# Altium PCB 把手指纹密码锁20201030.PcbDoc (part 1 of 2)
Units mm, origin at the board's own origin, x right, y up, seen from the top; angles counter-clockwise.
Board outline 142.19 x 18 mm, 2 copper layers (Top Layer, Bottom Layer); 76 components, 61 nets, 259 pads, 300 vias.
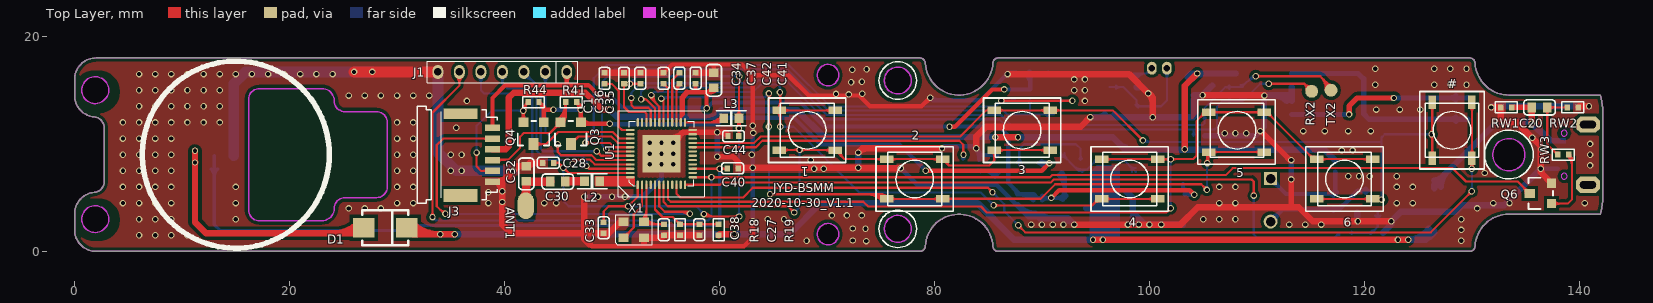
[diagram p0: Top Layer view]
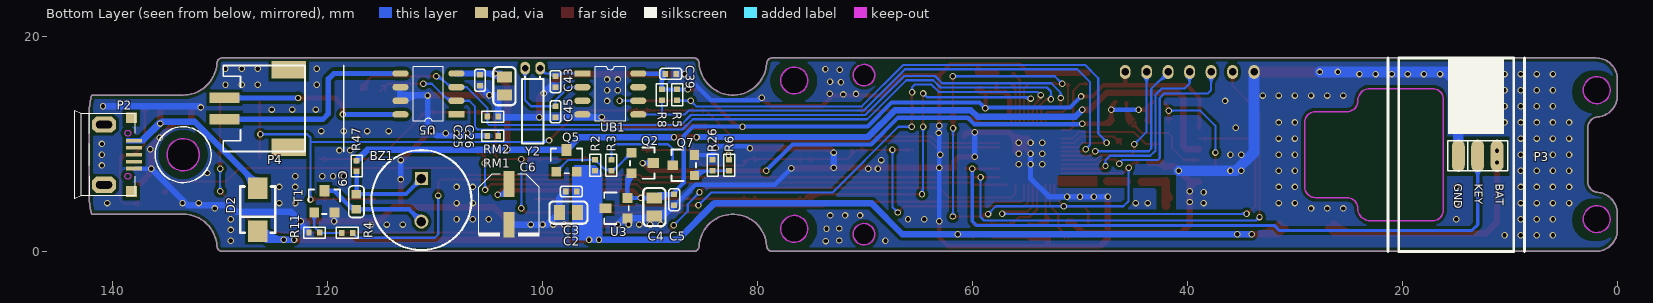
[diagram p1: Bottom Layer view, seen from below]
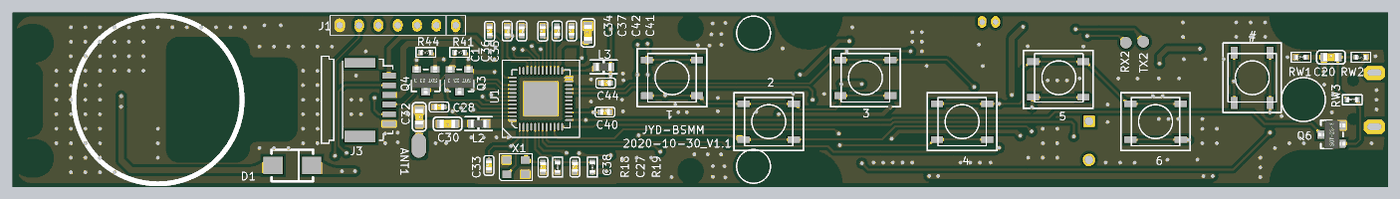
[diagram p3: 3D render of the assembled board from above, using the file's embedded part models]
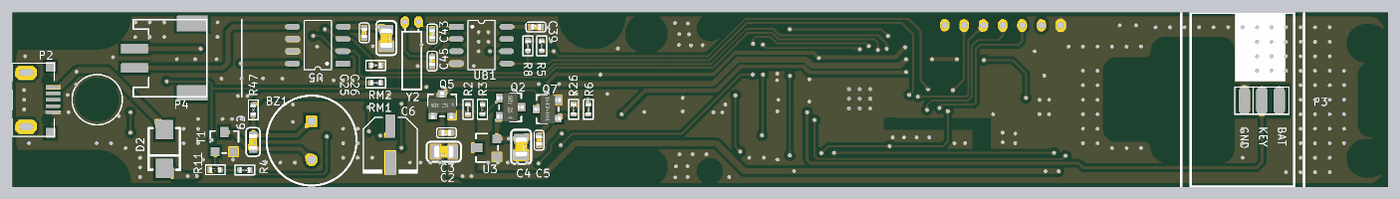
[diagram p4: 3D render of the assembled board from below, using the file's embedded part models]

## Layer stack, top to bottom
Top Layer: signal copper 0.0356
Dielectric: dielectric 0.32, FR-4, Dk 4.8
Bottom Layer: signal copper 0.0356

## Board outline
2,0.005 cw(c2,2.005) 0,2.005 0,3.505 cw(c2,3.505) 1.833,5.498 ccw(c1.75,6.494) 2.75,6.494 2.75,11.515 ccw(c1.75,11.515) 1.833,12.512 cw(c2,14.505) 0,14.505 0,16.005 cw(c2,16.005) 2,18.005 78.645,18.005 cw(c78.645,17.505) 79.145,17.531 ccw(c82.29,17.7) 85.436,17.531 cw(c85.935,17.505) 85.935,18.005 129.795,18.005 cw(c129.795,17.505) 130.295,17.531 ccw(c133.44,17.7) 133.44,14.55 141.945,14.55 cw(c137.19,13.005) 142.19,13.005 142.19,5.005 cw(c137.19,5.005) 141.945,3.459 133.44,3.459 ccw(c133.44,0.309) 130.295,0.478 cw(c129.795,0.505) 129.795,0.005 85.935,0.005 cw(c85.935,0.505) 85.436,0.478 ccw(c82.29,0.309) 79.145,0.478 cw(c78.645,0.505) 78.645,0.005
cut-out: 75.34,15.905 ccw(c76.59,15.905) 76.59,14.655 ccw(c76.59,15.905) 77.84,15.905 ccw(c76.59,15.905) 76.59,17.155 ccw(c76.59,15.905)
cut-out: 69.09,16.405 ccw(c70.09,16.405) 70.09,15.405 ccw(c70.09,16.405) 71.09,16.405 ccw(c70.09,16.405) 70.09,17.405 ccw(c70.09,16.405)
cut-out: 75.34,2.105 ccw(c76.59,2.105) 76.59,0.855 ccw(c76.59,2.105) 77.84,2.105 ccw(c76.59,2.105) 76.59,3.355 ccw(c76.59,2.105)
cut-out: 69.09,1.605 ccw(c70.09,1.605) 70.09,0.605 ccw(c70.09,1.605) 71.09,1.605 ccw(c70.09,1.605) 70.09,2.605 ccw(c70.09,1.605)
cut-out: 1.921,13.755 cw(c1.921,15.005) 0.671,15.005 cw(c1.921,15.005) 1.921,16.255 cw(c1.921,15.005) 3.171,15.005 cw(c1.921,15.005)
cut-out: 1.921,1.755 cw(c1.921,3.005) 0.671,3.005 cw(c1.921,3.005) 1.921,4.255 cw(c1.921,3.005) 3.171,3.005 cw(c1.921,3.005)
cut-out: 131.94,9.005 ccw(c133.44,9.005) 133.44,7.505 ccw(c133.44,9.005) 134.94,9.005 ccw(c133.44,9.005) 133.44,10.505 ccw(c133.44,9.005)

## Design rules (kind name [scope] priority, off if disabled: settings)
Clearance Clearance_2 [All] p1: gap=0.1
Clearance Clearance_1 [All] p2 off: gap=0.3
Clearance [All] p3 off: gap=0.2
HoleToHoleClearance [All] p1: gap=-20 allowstackedmicrovias=TRUE
MinimumSolderMaskSliver [All] p1: minsoldermaskwidth=-20
PolygonConnect [All] p1: connectstyle=Direct reliefconductorwidth=0.254 reliefentries=4 polygonreliefangle="90 Angle" airgapwidth=0.254
RoutingVias [All] p1: holewidth=0.4 width=0.6 viastyle="Through Hole" minholewidth=0.3 minwidth=0.5 maxholewidth=0.4 maxwidth=0.6
ShortCircuit [All] p1: allowed=TRUE
SilkToSilkClearance [All] p1: silktosilkclearance=-20
SilkToSolderMaskClearance [IsPad] p1: minsilkscreentomaskgap=-20 clearancetoexposedcopper=TRUE
SolderMaskExpansion [All] p1: expansion=0.102
Width [All] p1: maxlimit=2 minlimit=0.15 preferedwidth=0.2
23 further rules are at their usual default settings.

## Components (designator, comment, footprint, x,y, rotation, side; value= is the part's Value field where it differs from the comment)
1 "SW" KEY_5.1*5.1*1.5 68.16,11.275 r0 top locked
2 "SW" KEY_5.1*5.1*1.5 78.16,6.735 r180 top locked
3 "SW" KEY_5.1*5.1*1.5 88.16,11.275 r0 top locked
4 "SW" KEY_5.1*5.1*1.5 98.16,6.735 r180 top locked
5 "SW" KEY_5.1*5.1*1.5 108.1,11.1 r180 top
6 "SW" KEY_5.1*5.1*1.5 118.16,6.735 r180 top locked
# "SW" KEY_5.1*5.1*1.5 128.16,11.275 r90 top locked
ANT1 "ANT" ANT_mark 41.975,4.25 r270 top
BZ1 "BUZZER" BUZZER_D93_L40 111.275,4.775 r270 bottom
C1 "100nF" 0402C 49.3,16.1 r90 top
C2 "10uF" 0805C 97.6,3.617 r0 bottom
C3 "100nF" 0402C 97.325,5.575 r0 bottom
C4 "10uF" 0805C 89.6,4.125 r270 bottom
C5 "100nF" 0402C 87.75,4.808 r270 bottom
C6 "220uF" R5*5.8 103.125,4.375 r270 bottom
C9 "10uF" 0603C 117.325,4.625 r270 bottom (schematic designator c9)
C20 "10uF" 0603C 136.3,13.4 r0 top
C25 "100nF" 0402C 105.825,15.925 r270 bottom
C26 "22uF" 0805C 103.55,15.375 r270 bottom
C27 "1nF" 0402C 58.125,2.025 r90 top
C28 "1uF" 0402C 44.075,8.25 r0 top
C30 "1.5pF" 0603C 44.95,6.5 r180 top
C32 "1pF" 0603C 42.025,7.225 r270 top
C33 "100nF" 0402C 49.225,2.196 r90 top
C34 "100nF" 0402C 54.8,16.1 r90 top
C35 "1uF" 0402C 52.628,16.108 r270 top
C36 "100nF" 0402C 51.114,16.108 r270 top
C37 "100nF" 0402C 56.275,16.125 r270 top
C38 "2.7pF" 0402C 54.825,2.025 r90 top
C39 "100nF" 0402C 88.075,16.525 r180 bottom
C40 "1nF" 0402C 61.225,7.725 r0 top
C41 "10uF" 0603C 59.475,15.925 r90 top
C42 "100nF" 0402C 57.775,16.125 r90 top
C43 "22pF" 0402C 98.8,15.8 r270 bottom
C44 "10uF" 0402C 61.3,10.725 r0 top
C45 "22pF" 0402C 98.8,13 r90 bottom
D1 "SS14" DO-214AA 28.9,2.2 r180 top
D2 "SS14" DO-214AA 126.5,3.9 r90 bottom
J1 "7P" 7P-2.0MM 45.8,16.7 r180 top
J3 "指纹串口" SM06B-SRSS-TB 38.9,9 r270 top locked
L2 "2nH" 0603L 48.15,6.525 r0 top
L3 "2.2UH" 0603L 61.1,12.4 r0 top
P2 "MICROUSB" MICRO-USB_F-B 139.4,9 r270 bottom
P3 "电池盒" 3P-1.8MM 14.8,8.9 r180 bottom
P4 "电机接口" S2B-PH-SM3-TB 128.1,13.3 r90 bottom
Q2 "SI2301" "SOT-23 - GDS" 90.725,8.225 r270 bottom
Q3 "BSS123W" "SOT-23 - GDS" 46.17,11 r180 top
Q4 "BSS123W" "SOT-23 - GDS" 42.7,11 r180 top
Q5 "SI2301" "SOT-23 - GDS" 97.775,8.425 r180 bottom
Q6 "PMBT3904" "SOT-23 - BCE" 136.4,5.4 r90 top
Q7 "PMBT3904" "SOT-23 - BCE" 86.875,8.025 r90 bottom
R2 "100K" 0402R 95.1,8.012 r90 bottom
R3 "1K" 0402R 93.6,8.012 r90 bottom
R4 "200R" 0402R 118.175,1.725 r180 bottom
R5 "10K" 0402R 87.475,14.575 r90 bottom
R6 "4.7K" 0402R 82.65,8.012 r90 bottom
R8 "10K" 0402R 88.9,14.575 r90 bottom
R11 "10K" 0402R 121.225,1.75 r0 bottom
R18 "100K%1" 0402R 56.325,2.025 r270 top
R19 "510%1" 0402R 59.925,2.025 r90 top
R26 "10K" 0402R 84.175,8.012 r90 bottom
R41 "10K" 0402R 46.2,13.9 r0 top
R44 "10K" 0402R 42.7,13.9 r0 top
R47 "10R" 0402R 117.3,7.95 r90 bottom
RM1 "10K" 0402R 104.625,10.75 r180 bottom
RM2 "10K" 0402R 104.625,12.55 r0 bottom
RW1 "100K" 0402R 133.2,13.4 r180 top
RW2 "100K" 0402R 139.4,13.4 r180 top
RW3 "100R" 0402R 138.5,9 r180 top
T1 "SS8050" SOT-23-3L 120.3,4.625 r180 bottom
U1 "BK3435QFN48_A" QFN48_6*6*0.4 54.6,9.1 r90 top
U3 "HT7533" SOT-23-3L 93.125,4.025 r90 bottom
U5 "CP2117" SOP8 110.625,14.65 r0 bottom
UB1 "PCF8563" SOP8 93.7,14.65 r180 bottom
X1 "16MHZ" XTAL3225 52.025,2.025 r0 top
Y2 "32.768KHZ" 晶振-9 100.225,17.05 r0 bottom

## Footprints (in the part's own frame and the unit in brackets; to place one, negate y for a bottom-side part, rotate by r counter-clockwise, add the part's x,y. Pads: shape width x height; smd on the part's side, far side on the other; paste and mask are expansions set on the pad)
3P-1.8MM [mm]
  oval 1.2x3 smd: 1(0,0) 2(1.8,0) 3(3.6,0)
  silkscreen extent -1,-1.4 4.6,1.4
7P-2.0MM [mm]
  oval 1x1.3 hole 0.7 mask+0.05: 1(0,0) 2(2,0) 3(4,0) 4(6,0) 5(8,0) 6(10,0) 7(12,0)
  silkscreen extent -1,-1 13,1
0402C [mil]
  rect 20x22 smd mask+2: 1(-20,0) 2(20,0)
  silkscreen extent -40,-20 40,20, body extent -19,-12 20,12, height 8
0402R [mil]
  rect 20x22 smd mask+2: 1(-20,0) 2(20,0)
  silkscreen extent -40,-20 40,20, body extent -23,-11 23,11, height 16
0603C [mm]
  rect 0.8x0.9 smd: 1(-0.711,0) 2(0.711,0)
  silkscreen extent -1.47,-0.71 1.47,0.71, body extent -0.8,-0.4 0.8,0.4, height 0.3
0603L [mm]
  rect 0.8x0.9 smd: 1(-0.711,0) 2(0.711,0)
  silkscreen extent -1.4,-0.7 1.4,0.7, body extent -0.82,-0.41 0.82,0.41, height 0.46
0805C [mil]
  rect 40x56 smd: 1(-33,0) 2(33,0)
  silkscreen extent -70,-41 70,41, body extent -39,-25 39,25, height 30
ANT_mark [mm]
  oval 2.5x1.5 smd: 1(0,0)
BUZZER_D93_L40 [mm]
  rect 1.2x1.2 hole 0.9: 1(-2,0)
  round 1.3 hole 0.9: 2(2,0)
  silkscreen extent -4.65,-4.65 4.65,4.65
DO-214AA [mm]
  rect 2x1.8 smd: 1(2,0) 2(-2,0)
  silkscreen extent -2.15,-1.63 2.15,1.63
KEY_5.1*5.1*1.5 [mm]
  rect 1.25x0.7 smd: 1(-2.6,1.85) 1(2.6,1.85) 2(-2.6,-1.85) 2(2.6,-1.85)
  silkscreen extent -3.6,-3 3.6,3
MICRO-USB_F-B [mm]
  rect 0.36x1.5 smd mask+0.05: 1(-1.3,1.4) 2(-0.65,1.4) 3(0,1.4) 4(0.65,1.4) 5(1.3,1.4)
  oct 1.5x2.2 hole 0.7 slot 1.5 at 90 deg mask+0.05: 6(2.8,-1.4) 7(-2.8,-1.4)
  rect 1x1 smd: 8(3.429,1.143) 9(-3.429,1.143)
  Keep-Out Layer circle w0.1: c-2,0.813 r0.275
  Keep-Out Layer circle w0.1: c2,0.813 r0.275
  silkscreen extent -4.1,-4.14 4.1,1.5
QFN48_6*6*0.4 [mm]
  rect 3.5x3.5 smd: 0(0,0)
  oval 0.8x0.2 smd: 1(-2.9,2.2) 2(-2.9,1.8) 3(-2.9,1.4) 4(-2.9,1) 5(-2.9,0.6) 6(-2.9,0.2) 7(-2.9,-0.2) 8(-2.9,-0.6) 9(-2.9,-1) 10(-2.9,-1.4) 11(-2.9,-1.8) 12(-2.9,-2.2) 25(2.9,-2.2) 26(2.9,-1.8) 27(2.9,-1.4) 28(2.9,-1) 29(2.9,-0.6) 30(2.9,-0.2) 31(2.9,0.2) 32(2.9,0.6) 33(2.9,1) 34(2.9,1.4) 35(2.9,1.8) 36(2.9,2.2)
  oval 0.2x0.8 smd: 13(-2.2,-2.9) 14(-1.8,-2.9) 15(-1.4,-2.9) 16(-1,-2.9) 17(-0.6,-2.9) 18(-0.2,-2.9) 19(0.2,-2.9) 20(0.6,-2.9) 21(1,-2.9) 22(1.4,-2.9) 23(1.8,-2.9) 24(2.2,-2.9) 37(2.2,2.9) 38(1.8,2.9) 39(1.4,2.9) 40(1,2.9) 41(0.6,2.9) 42(0.2,2.9) 43(-0.2,2.9) 44(-0.6,2.9) 45(-1,2.9) 46(-1.4,2.9) 47(-1.8,2.9) 48(-2.2,2.9)
  silkscreen extent -4,-4 4,4
R5*5.8 [mm]
  rect 2.4x1 smd: 1(-1.9,0) 2(1.9,0)
  silkscreen extent -2.8,-2.85 3,2.85
S2B-PH-SM3-TB [mm]
  rect 1x2.8 smd mask+0.05: 1(-1,1.5) 2(1,1.5)
  rect 1.6x3.2 smd mask+0.05: A(-3.6,-4.5) B(3.6,-4.5)
  silkscreen extent -4,-9.6 4,1.6
SM06B-SRSS-TB [mm]
  rect 0.6x1.4 smd paste+0: 1(-2.5,0) 2(-1.5,0) 3(-0.5,0) 4(0.5,0) 5(1.5,0) 6(2.5,0)
  rect 1x3.2 smd paste+0: A(-3.8,-3)
  rect 1.2x3.2 smd: B(3.8,-3)
  silkscreen extent -4.5,-7 4.5,0.4
SOP8 [mm]
  rect 1.5x0.6 smd mask+0.05: 1(-2.6,1.905)
  oval 1.5x0.6 smd mask+0.05: 2(-2.6,0.635) 3(-2.6,-0.635) 4(-2.6,-1.905) 5(2.6,-1.905) 6(2.6,-0.635) 7(2.6,0.635) 8(2.6,1.905)
  round 0.4 on Bottom Overlay mask+0.05: ""(-0.949,1.905)
  silkscreen extent -1.4,-2.54 1.4,2.54
"SOT-23 - BCE" [mm]
  rect 0.85x0.85 smd: B(-0.95,-1.016)
  rect 0.85x1 smd: C(0,1.016)
  rect 0.914x0.85 smd: E(0.95,-1.016)
  silkscreen extent -1.46,-1.14 1.46,1.14, body extent -1.45,-1.4 1.45,1.4, height 1.2
"SOT-23 - GDS" [mil]
  rect 36x43.31 smd: D(0,40)
  rect 36x36 smd: G(-37.4,-40) S(37.4,-40)
  silkscreen extent -57,-45 58,45, body extent -57,-55 57,55, height 47
SOT-23-3L [mil]
  rect 36x36 smd: 1(-37.4,-40) 2(37.4,-40)
  rect 36x43.31 smd: 3(0,40)
  silkscreen extent -57,-45 58,45
XTAL3225 [mm]
  rect 0.9x0.8 smd: 1(-0.95,-0.75) 2(0.95,-0.75) 3(0.95,0.75) 4(-0.95,0.75)
  silkscreen extent -1.7,-1.4 1.7,1.4
晶振-9 [mm]
  oval 0.9x1.2 hole 0.6: 1(0,0) 2(1.4,0)
  silkscreen extent -0.3,0.76 1.7,7

## Part data
1 2 3 4 5 6 #: "Switch"
ANT1: library part Socket, "Socket"
BZ1: "Buzzer"
C1 C28 C30 C32 C33 C34 C35 C36 C37 C38 C41 C42 C44: library part Cap, "Capacitor"
C2 C4 C9: library part CAP-P, "Capacitor, tolerance ±20%"
C3: library part "CAP NP"
C5 C6 C20 C25 C26 C27: library part CAP-NP, "Capacitor, Ceramic"
C39 C40 C43 C45: library part C
D1 D2: library part D
J3: library part "Header 6", "Header, 6-Pin"
L2 L3: "Power Inductor, 4.7uH, 0.7A, 260mR DCR"
P2 P4: library part MHDR1X2, "Header, 2-Pin"
P3: library part "Header 3", "Header, 3-Pin"
Q2 Q5: library part PWRMOSFET_EP_DGS_0
Q3 Q4: library part BSS123L_0
R2 R3 R5 R6 R8 R26 RW1 RW2 RW3: library part R
R4 R11 R47: library part R_Dup1
R18 R19: library part Res2, "Resistor"
R41 R44: library part RES
RM1 RM2: library part Pro71C3.TMP_UnNamed_1
T1: library part NPN_BJT, "Bipolar Junction Transistor"
U1: library part EFR32BG1-QFN48
U3: library part XC6206P302M
U5: library part AM24LC02_0
UB1: library part IC8
Y2: library part 晶振

## Free pads (board coordinates)
  round 1.2 smd: 0(115.1,14.9) 1(116.9,15)

## Via types
v1: diameter 0.6, hole 0.4, Top Layer to Bottom Layer, tented both sides, 300 vias

## Nets (pads, with @x,y where several pads share a name; then routed paths per layer and width w, separated by ;. In a path a pad name is that pad's centre, name@x,y a point inside that pad or via, vN(x,y) a via of type N, cw(c..) or ccw(c..) an arc to the next point about the centre after c; other vN are vias at no path point)
ANT: ANT1.1 C30.2 C32.2 | length 5.2
  Top Layer w0.5: C32.2@41.986,6.475 C32.2@42.025,6.514
  Top Layer w0.8: ANT1.1@41.728,4.997 ccw(c41.009,5.716) 42.025,5.716 ; ANT1.1@41.975,4.25 42.025,4.3 C32.2@42.025,6.514 ; C32.2@42.164,6.5 C30.2@44.239,6.5
BAT_ADC: C27.2 R18.1 R19.2 U1.5 | length 11.7
  Top Layer w0.2: U1.5@54,6.2 54,3.9 54.7,3.2 55.658,3.2 R18.1@56.325,2.533 R19.2@59.925,2.533 ; 56.019,2.839 cw(c55.712,2.533) R18.1@56.146,2.533 ; R18.1@56.08,2.778 ccw(c56.3,2.997) R18.1@56.3,2.687 ; R18.1@56.459,2.424 cw(c56.722,2.161) 56.722,2.533 cw(c56.722,2.905) R18.1@56.459,2.642 ; C27.2@57.991,2.424 ccw(c57.728,2.161) 57.728,2.533 ccw(c57.728,2.905) C27.2@57.991,2.642 ; C27.2@58.259,2.424 cw(c58.522,2.161) 58.522,2.533 cw(c58.522,2.905) C27.2@58.259,2.642 ; R19.2@59.791,2.424 ccw(c59.528,2.161) 59.528,2.533 ccw(c59.528,2.905) R19.2@59.791,2.642
BEEP: R4.2 U1.12 | length 68.5
  Top Layer w0.2: U1.12@56.8,6.2 60.05,6.2 60.25,6.4 90.809,6.4 91.109,6.7 109.5,6.7 109.7,6.5 v1(109.7,5.2) ; v1@109.559,5.341 ccw(c109.217,5.683) 109.7,5.683 ccw(c110.183,5.683) v1@109.841,5.341
  Bottom Layer w0.2: v1@109.559,5.059 cw(c109.217,4.717) 109.7,4.717 cw(c110.183,4.717) v1@109.841,5.059 ; v1(109.7,5.2) 109.7,1.6 110.025,1.275 117.217,1.275 R4.2@117.667,1.725 ; 117.361,1.419 cw(c117.667,1.112) R4.2@117.667,1.546 ; R4.2@117.422,1.48 ccw(c117.203,1.7) R4.2@117.513,1.7
CE(RST): U1.16
GND: C1.2 C2.2 C3.2 C4.2 C5.2 C6.2 C25.2 C26.2 C27.1 C28.1 C32.1 C33.1 C34.2 C35.1 C36.1 C38.1 C39.2 C40.2 C41.2 C42.2 C43.2 C44.1 C45.1 J1.7 J3.6 P2.5 P3.1 Q6.E Q7.E R11.2 R18.2 R26.2 RM1.1 RM2.1 RW1.2 RW2.1 T1.2 U1.0 U1.23 U1.24 U3.1 U5.6 U5.7 UB1.4 X1.2 X1.4 | length 404.4
  Top Layer w0.4: 48,0.6 48.125,0.475 62.275,0.475 63.1,1.3 v1(63.1,2.8) ; C34.2@54.8,16.608 55.592,17.4 59.5,17.4 ; C41.2@59.334,16.778 ccw(c58.992,17.119) 59.475,17.119 ccw(c59.958,17.119) C41.2@59.616,16.778 ; C41.2@59.475,16.636 59.475,17.375 59.5,17.4 ; v1(63.1,11.7) 63.1,16.4 ; v1(79.6,14.3) 78.8,13.5 74,13.5 73,14.5 68.3,14.5 66.4,16.4 63.1,16.4 ; 59.5,17.4 62.1,17.4 63.1,16.4
  Top Layer w0.5: v1(54.6,9.1) 56.6,11.1 ; U1.0@54.789,10.082 ccw(c55.03,11.337) 55.933,10.433 ccw(c56.837,9.53) U1.0@55.582,9.289 ; U1.0@54.883,10.573 ccw(c55.245,12.455) 56.6,11.1 ; U1.0@55.244,10.158 cw(c55.338,9.593) U1.0@55.671,10.059 ; U1.0@55.75,10.093 cw(c56.285,10.022) U1.0@55.957,10.451 ; U1.0@56.073,9.383 cw(c57.955,9.745) 56.6,11.1 ; v1(59.8,8.8) 61.3,8.8 61.733,8.367 C40.2@61.733,7.725 ; v1@59.938,11.1 cw(c59.938,9.897) C44.1@60.789,10.748 ; C44.1@60.788,10.75 ccw(c60.417,10.728) 60.417,11.1 ; C44.1@60.792,10.725 60.417,11.1 ; v1(110.3,11.2) 110.361,11.2 113.061,8.5 v1(113.2,8.5) ; 112.878,8.683 ccw(c113.2,9.005) v1@113.2,8.55 ; 113.2,4.1 v1(113.2,6.7) ; 56.6,11.1 v1(59.8,11.1) 60.417,11.1
  Top Layer w0.6: J3.6@38.9,6.5 39.8,6.5 ; 39.8,5.293 ccw(c38.093,5.293) 39.3,6.5 ccw(c39.3,7.707) 40.154,6.854 ; C32.1@42.146,7.865 cw(c43.074,6.937) 43.074,8.25 ; C28.1@43.567,8.25 42.339,8.25 C32.1@42.025,7.936 41.236,7.936 v1(40.8,7.5) 39.8,6.5 ; v1(47.4,5.1) 47.4,1.688 ; 48,0.6 47.4,1.2 47.4,1.688 ; C33.1@49.223,1.651 ccw(c49.434,1.943) 49.688,1.688 ; C33.1@49.25,1.642 ccw(c49.25,2.588) 49.919,1.919 ; C1.2@49.3,16.608 52.62,16.608 C35.1@52.628,16.616 54.792,16.616 C34.2@54.8,16.608 ; 50.428,2.428 cw(c51.025,1.83) X1.4@51.025,2.675 ; X1.4@51.075,2.775 50.775,2.775 49.688,1.688 ; 52.975,0.643 X1.2@52.975,1.275 54.583,1.275 C38.1@54.825,1.517 C27.1@58.125,1.517 ; 54.326,1.275 ccw(c54.326,1.99) C38.1@54.832,1.484 ; C42.2@57.775,16.633 59.472,16.633 C41.2@59.475,16.636 ; C40.2@61.733,7.725 61.808,7.8 v1(63.1,7.8) v1(72.9,7.8) ; v1@72.9,7.735 v1(76.865,7.735) ; 73.866,9.6 ccw(c73.866,8.234) v1(72.9,9.2) 73.3,9.6 v1(80.7,9.6) ; v1(83.9,9.6) 83.9,10.7 84.8,11.6 93.6,11.6 v1(94.5,12.5) ; v1(86.8,16.5) 98.1,16.5 v1(99.9,14.7) ; v1(93,2.5) v1(101.1,2.5) 102.9,2.5 104.5,4.1 113.2,4.1 113.9,4.1 115.2,2.8 v1(119.4,2.8) v1(122.5,2.8) ; v1(100.3,12.492) 100.3,14.3 v1(99.9,14.7) ; 100.3,13.734 ccw(c98.934,13.734) v1(99.9,14.7) ; 100.3,14.134 ccw(c99.7,14.134) v1(99.9,14.7) ; v1(104.945,14.537) 110.663,14.537 v1(110.7,14.5) ; v1(131.8,13.4) RW1.2@132.692,13.4 132.692,12.308 133,12 134.177,12 136.4,9.777 v1(136.4,7.7) ; RW1.2@132.646,13.375 ccw(c133.016,13.375) 132.754,13.113 ; 136.636,7.13 cw(c137.206,7.7) v1(136.4,7.7) ; Q6.E@137.416,6.35 136.4,7.366 v1(136.4,7.7) ; RW2.1@139.908,13.4 140.008,13.5 v1(140.9,13.5) ; 39.8,6.5 39.8,2.5 40.612,1.688 47.4,1.688 ; 47.4,1.688 C33.1@49.225,1.688 49.688,1.688
  Top Layer w1: v1(26,16.7) v1(27.7,16.7) J1.7@33.8,16.7
  Bottom Layer w0.4: v1(63.1,2.8) v1(63.1,7.8) v1(63.1,11.7) ; v1(76.865,7.735) 78.4,6.2 85.614,6.2 85.767,6.2 87.667,4.3 C5.2@87.75,4.3 ; v1(79.6,14.3) 79.831,14.069 84.331,14.069 86.762,16.5 v1(86.8,16.5) ; v1@79.671,14.371 ccw(c80.399,15.099) 80.399,14.069 ; v1(80.7,9.6) 80.9,9.8 83.6,9.8 84.175,9.225 R26.2@84.175,8.52 ; v1@80.771,9.529 cw(c81.424,8.876) 81.424,9.8 ; 83.176,9.8 cw(c83.176,8.876) 83.829,9.529 cw(c82.995,8.695) R26.2@84.175,8.695 ; v1@83.879,9.502 cw(c83.799,9.135) 84.175,9.135 ; v1@84,9.6 ccw(c84.483,9.6) 84.141,9.259 ; 84.2,8.975 Q7.E@85.859,8.975 ; Q7.E@85.7,8.816 ccw(c85.316,8.432) 85.316,8.975 ccw(c85.316,9.518) Q7.E@85.7,9.134 ; 86.564,16.302 cw(c86.8,16.067) v1@86.8,16.4 ; v1(136.4,7.7) P2.5@138,7.7
  Bottom Layer w0.5: v1(47.4,5.1) 52.9,5.1 54.6,6.8 v1(54.6,9.1) ; v1(59.8,8.8) v1(59.8,11.1) ; RM1.1@105.133,10.75 109.85,10.75 v1(110.3,11.2) 110.7,11.6 v1(110.7,14.5) ; v1(113.2,6.7) v1(113.2,8.5)
  Bottom Layer w0.6: v1(72.9,7.8) v1(72.9,9.2) ; v1(86.8,16.5) 86.825,16.525 C39.2@87.567,16.525 ; C5.2@87.75,4.3 88.763,3.287 C4.2@89.6,3.287 89.812,3.075 U3.1@92.109,3.075 92.425,3.075 v1(93,2.5) ; C5.2@87.96,4.09 ccw(c89.397,5.527) C4.2@89.397,3.495 ; C4.2@89.95,3.434 ccw(c90.817,4.3) 90.817,3.075 ; U3.1@92.109,2.918 cw(c92.109,1.775) v1@92.917,2.583 ; v1(94.5,12.5) 94.508,12.492 C45.1@98.8,12.492 v1(100.3,12.492) RM2.1@104.059,12.492 ; 95.239,12.492 ccw(c95.239,13.356) UB1.4@95.85,12.745 ; UB1.4@96.75,12.745 ccw(c97.361,13.356) 97.361,12.492 ; C3.2@97.833,5.575 98.438,4.97 C2.2@98.438,3.617 99.58,2.475 C6.2@103.125,2.475 ; C2.2@98.438,3.206 cw(c98.438,2.213) 99.14,2.915 ; C43.2@98.798,15.329 cw(c99.032,15.016) 99.308,15.292 ; C43.2@98.8,15.292 99.308,15.292 ; C43.2@98.825,15.338 cw(c98.825,14.284) 99.571,15.029 ; v1(99.9,14.7) 99.308,15.292 ; RM2.1@104.117,12.55 104.117,14.117 104.537,14.537 v1(104.945,14.537) ; C26.2@104.117,14.537 v1(104.945,14.537) ; C25.2@105.825,15.417 v1(104.945,14.537) ; v1(110.7,14.5) 110.737,14.537 113.162,14.537 113.225,14.6 ; 111.515,14.537 cw(c111.515,12.755) U5.7@112.775,14.015 ; U5.7@113.225,14.015 113.225,14.6 ; U5.6@113.225,15.285 113.225,14.6 ; T1.2@119.35,3.609 119.35,2.85 v1(119.4,2.8) ; R11.2@121.733,1.75 122.5,2.517 v1(122.5,2.8) ; 122.3,2.317 ccw(c121.817,2.8) v1(122.5,2.8) ; v1(131.8,13.4) 131.9,13.5 v1(140.9,13.5) ; v1(136.4,7.7) 133,4.3 129.1,4.3 128.5,3.7 123.4,3.7 v1(122.5,2.8)
  Bottom Layer w1: P3.1@14.8,8.9 14.8,15.6 15.9,16.7 v1(26,16.7) v1(27.7,16.7) ; J1.7@33.8,16.7 33.8,9.2 35.5,7.5 v1(40.8,7.5)
  other v1: 73.66,0.965 68.1,1 129,1 72.39,1.016 6,1.5 7.5,1.5 9,1.5 10.5,1.5 129,2 73.584,2.108 72.39,2.134 89,2.5 90,2.5 91,2.5 92,2.5 98,2.5 99,2.5 100,2.5 113,2.5 114.5,2.5 116,2.5 6,3 7.5,3 9,3 15,3 64.5,3 66,3 105,3 106.5,3 108,3 129,3 70.46,3.353 71.857,3.353 73.228,3.353 25.5,4 27,4 28.5,4 130.5,4 4.5,4.5 6,4.5 7.5,4.5 9,4.5 15,4.5 30,4.5 31.5,4.5 38.5,4.5 43.7,4.5 44.8,4.5 106.5,4.5 108,4.5 123,4.5 124.5,4.5 132,4.5 133.5,4.5 140.5,4.5 39.8,4.6 48.7,5.1 50,5.1 51.2,5.1 38.5,5.5 39.8,5.6 4.5,6 6,6 7.5,6 9,6 15,6 30,6 31.5,6 106.5,6 108,6 123,6 124.5,6 118.5,7 119.5,7 120.5,7 123,7 131.2,7.3 4.5,7.5 6,7.5 7.5,7.5 9,7.5 30,7.5 31.5,7.5 35,7.5 36,7.5 68.8,7.7 69.7,7.7 141,8 53.5,8.1 54.6,8.1 55.7,8.1 68.5,8.5 4.5,9 6,9 7.5,9 9,9 30,9 31.5,9 35,9 36,9 63,9 141,9 53.5,9.1 55.7,9.1 117.9,9.4 118.9,9.4 136.5,9.5 141,10 53.5,10.1 54.6,10.1 55.7,10.1 4.5,10.5 6,10.5 7.5,10.5 9,10.5 30,10.5 31.5,10.5 135.611,10.566 107,11 108,11 109,11 63.144,11.024 114.3,11.2 116.3,11.2 118.5,11.2 120.6,11.2 35.5,11.5 4.5,12 6,12 7.5,12 9,12 10.5,12 12,12 13.5,12 30,12 31.5,12 121.1,13.2 123.3,13.2 125.2,13.2 6,13.5 7.5,13.5 9,13.5 10.5,13.5 12,13.5 13.5,13.5 36.5,14 94,14 25.5,14.5 27,14.5 28.5,14.5 30,14.5 31.5,14.5 33,14.5 72.034,14.605 70.841,14.656 73.279,14.681 6,15 7.5,15 9,15 10.5,15 12,15 13.5,15 93,15 94,15 121,15.5 126.5,15.5 128,15.5 129.5,15.5 72.238,15.748 73.254,15.799 93,16 94,16 6,16.5 7.5,16.5 9,16.5 10.5,16.5 12,16.5 13.5,16.5 15,16.5 16.5,16.5 18,16.5 19.5,16.5 21,16.5 22.5,16.5 24,16.5 72.365,16.891 73.685,16.942 121,17 126.5,17 128,17 129.5,17
INT_FP: J3.2 U1.6 | length 44.6
  Top Layer w0.2: 33.988,3.912 ccw(c34.5,4.424) v1@34.5,3.7 ; 34.229,3.671 cw(c34.059,3.5) v1@34.3,3.5 ; v1(34.5,3.5) 34.4,3.5 33.7,4.2 33.7,9.9 34.3,10.5 J3.2@38.9,10.5 ; J3.2@38.359,10.359 ccw(c38.017,10.017) 38.017,10.5 ccw(c38.017,10.983) J3.2@38.359,10.641 ; U1.6@54.4,6.2 54.4,4.2 54.9,3.7 57.05,3.7 v1(57.25,3.5) ccw(c56.767,3.017) 56.767,3.7 ; 56.284,3.7 cw(c56.284,2.534) v1@57.109,3.359
  Bottom Layer w0.2: v1(34.5,3.5) v1(57.25,3.5) ; v1@34.641,3.359 cw(c34.983,3.017) 34.983,3.5 cw(c34.983,3.983) v1@34.641,3.641 ; v1@57.109,3.359 ccw(c56.767,3.017) 56.767,3.5 ccw(c56.767,3.983) v1@57.109,3.641
IRQ_RF: U1.4
IRQ_TSM12: U1.11
KEYX_1: 1.2 2.2 3.2 U1.7 | length 60.9
  Top Layer w0.2: U1.7@54.8,6.2 54.8,4.6 55.2,4.2 66.375,4.2 v1(66.95,3.625) ; 1.2@65.56,9.425 65.585,9.45 v1(67.45,9.45) ; 1.2@66.012,9.248 cw(c66.499,8.761) 66.499,9.45 ; 1.2@66.012,9.602 ccw(c66.378,9.968) 66.378,9.45 ; v1@66.75,3.625 ccw(c66.267,3.625) 66.609,3.966 ccw(c66.95,4.308) v1@66.95,3.825 ; v1@67.309,9.309 ccw(c66.967,8.967) 66.967,9.45 ccw(c66.967,9.933) v1@67.309,9.591 ; v1@67.45,9.425 1.2@70.76,9.425 71.6,8.585 ; v1@67.591,9.309 cw(c67.872,9.028) 67.872,9.425 ; v1@67.591,9.591 ccw(c67.993,9.993) 67.993,9.425 ; 1.2@70.308,9.248 ccw(c69.881,8.821) 69.881,9.425 ccw(c69.881,10.029) 1.2@70.308,9.602 ; 1.2@71.085,9.422 ccw(c71.767,9.384) 71.284,8.901 ; 1.2@71.285,9.411 ccw(c72.365,9.35) 71.6,8.585 ; 2.2@75.108,8.408 ccw(c74.681,7.981) 74.681,8.585 ccw(c74.681,9.189) 2.2@75.108,8.762 ; 2.2@76.012,8.408 cw(c76.439,7.981) 76.439,8.585 cw(c76.439,9.189) 2.2@76.012,8.762 ; 2.2@80.308,8.408 ccw(c79.881,7.981) 79.881,8.585 ccw(c79.881,9.189) 2.2@80.308,8.762 ; 2.2@81.08,8.564 ccw(c81.37,8.428) 81.144,8.201 ; 2.2@81.261,8.479 ccw(c81.644,8.299) 81.345,8 ; 3.2@85.383,9.248 cw(c84.956,8.821) 85.56,8.821 cw(c86.164,8.821) 3.2@85.737,9.248 ; 3.2@86.012,9.248 cw(c86.439,8.821) 86.439,9.425 cw(c86.439,10.029) 3.2@86.012,9.602 ; 3.2@90.308,9.248 ccw(c89.881,8.821) 89.881,9.425 ccw(c89.881,10.029) 3.2@90.308,9.602 ; 3.2@90.76,9.425 3.2@85.56,9.425 85.56,8.46 85.1,8 81.345,8 ; 71.6,8.585 2.2@75.56,8.585 2.2@80.76,8.585 81.345,8
  Bottom Layer w0.2: v1(66.95,3.625) 67.45,4.125 v1(67.45,9.45) ; v1@66.95,3.825 ccw(c66.95,4.308) 67.291,3.966 ccw(c67.633,3.625) v1@67.15,3.625 ; v1@67.309,9.309 cw(c66.967,8.967) 67.45,8.967 cw(c67.933,8.967) v1@67.591,9.309
KEYX_2: 4.2 5.2 6.2 U1.8 | length 97.3
  Top Layer w0.2: U1.8@55.2,6.2 55.2,4.875 55.45,4.625 73.375,4.625 73.825,4.175 84.325,4.175 84.875,3.625 101.575,3.625 v1(101.975,4.025) ; 4.2@95.56,8.585 4.2@100.76,8.585 v1(101.975,8.585) 104.06,8.585 104.4,8.925 104.4,12.15 105.2,12.95 5.2@105.5,12.95 5.2@110.7,12.95 110.925,12.95 115.29,8.585 6.2@115.56,8.585 6.2@120.76,8.585 ; 4.2@96.012,8.408 cw(c96.439,7.981) 96.439,8.585 cw(c96.439,9.189) 4.2@96.012,8.762 ; 4.2@100.308,8.408 ccw(c99.881,7.981) 99.881,8.585 ccw(c99.881,9.189) 4.2@100.308,8.762 ; 4.2@101.212,8.408 cw(c101.639,7.981) 101.639,8.585 cw(c101.639,9.189) 4.2@101.212,8.762 ; v1@101.775,4.025 cw(c101.292,4.025) 101.634,3.684 cw(c101.975,3.342) v1@101.975,3.825 ; v1@101.834,8.444 ccw(c101.492,8.102) 101.492,8.585 ccw(c101.492,9.068) v1@101.834,8.726 ; v1@102.116,8.444 cw(c102.458,8.102) 102.458,8.585 cw(c102.458,9.068) v1@102.116,8.726 ; 104.756,12.506 cw(c105.225,12.036) 5.2@105.225,12.7 ; 104.816,12.566 ccw(c104.432,12.95) 5.2@104.975,12.95 ; 5.2@105.952,12.773 cw(c106.379,12.346) 106.379,12.95 cw(c106.379,13.554) 5.2@105.952,13.127 ; 5.2@110.248,12.773 ccw(c109.821,12.346) 109.821,12.95 ccw(c109.821,13.554) 5.2@110.248,13.127 ; 5.2@110.975,12.7 cw(c110.975,12.217) 111.316,12.559 ; 5.2@111.225,12.95 ccw(c111.949,12.95) 111.437,12.438 ; 114.855,9.02 cw(c114.419,8.585) 6.2@115.035,8.585 ; 114.867,9.008 ccw(c115.285,9.426) 6.2@115.285,8.835 ; 6.2@116.012,8.408 cw(c116.439,7.981) 116.439,8.585 cw(c116.439,9.189) 6.2@116.012,8.762 ; 6.2@120.308,8.408 ccw(c119.881,7.981) 119.881,8.585 ccw(c119.881,9.189) 6.2@120.308,8.762
  Bottom Layer w0.2: v1@101.834,4.166 ccw(c101.492,4.508) 101.975,4.508 ccw(c102.458,4.508) v1@102.116,4.166 ; v1@101.834,8.444 cw(c101.492,8.102) 101.975,8.102 cw(c102.458,8.102) v1@102.116,8.444 ; v1(101.975,4.025) v1(101.975,8.585)
KEYX_3: U1.9
KEYX_4: #.2 U1.10 | length 97.2
  Top Layer w0.2: U1.10@56,6.2 56,5.375 56.35,5.025 62.2,5.025 63.1,5.925 84.975,5.925 v1(85.4,5.5) ; v1@85.2,5.5 ccw(c84.717,5.5) 85.059,5.841 ccw(c85.4,6.183) v1@85.4,5.7 ; v1@87.8,2.225 cw(c87.8,1.742) 88.141,2.084 cw(c88.483,2.425) v1@88,2.425 ; v1(87.8,2.425) 88.45,1.775 126.175,1.775 v1(130,5.6) ; v1@129.8,5.6 cw(c129.317,5.6) 129.659,5.259 cw(c130,4.917) v1@130,5.4 ; #.2@129.833,8.223 cw(c129.406,7.796) 130.01,7.796 cw(c130.614,7.796) #.2@130.187,8.223 ; #.2@129.833,9.127 ccw(c129.406,9.554) 130.01,9.554 ccw(c130.614,9.554) #.2@130.187,9.127 ; #.2@129.833,13.423 cw(c129.406,12.996) 130.01,12.996 cw(c130.614,12.996) #.2@130.187,13.423 ; v1@129.859,7.841 ccw(c129.493,8.207) #.2@130.01,8.207 ; v1@129.882,7.861 ccw(c129.782,7.997) 129.945,8.04 ccw(c130.175,8.102) v1@130.08,7.883 ; v1@129.921,7.884 ccw(c129.807,8.147) 130.084,8.073 ccw(c130.322,8.009) v1@130.144,7.839 ; v1(130,7.7) 130.01,7.71 #.2@130.01,8.675 #.2@130.01,13.875 ; #.2@130.01,8.159 ccw(c130.459,8.159) v1@130.141,7.841
  Bottom Layer w0.2: v1@85.4,5.3 cw(c85.4,4.817) 85.741,5.159 cw(c86.083,5.5) v1@85.6,5.5 ; v1(85.4,5.5) 86.5,4.4 86.5,3.725 v1(87.8,2.425) ; v1@87.6,2.425 ccw(c87.117,2.425) 87.459,2.766 ccw(c87.8,3.108) v1@87.8,2.625 ; v1@129.859,5.741 ccw(c129.517,6.083) 130,6.083 ccw(c130.483,6.083) v1@130.141,5.741 ; v1@129.859,7.559 cw(c129.517,7.217) 130,7.217 cw(c130.483,7.217) v1@130.141,7.559 ; v1(130,5.6) v1(130,7.7)
KEYY_1: 3.1 6.1 #.1 U1.21 | length 104.6
  Top Layer w0.2: U1.21@57.5,10.1 63.225,10.1 63.825,10.7 82.4,10.7 84.825,13.125 ; 3.1@85.075,12.989 ccw(c84.825,12.827) 84.825,13.125 ; 3.1@85.075,13.261 cw(c84.825,13.423) 84.825,13.125 ; 3.1@86.012,12.948 cw(c86.439,12.521) 86.439,13.125 cw(c86.439,13.729) 3.1@86.012,13.302 ; 3.1@90.308,12.948 ccw(c89.881,12.521) 89.881,13.125 ccw(c89.881,13.729) 3.1@90.308,13.302 ; 3.1@91.212,12.948 cw(c91.639,12.521) 91.639,13.125 cw(c91.639,13.729) 3.1@91.212,13.302 ; v1@99.2,10.325 ccw(c98.717,10.325) 99.059,10.666 ccw(c99.4,11.008) v1@99.4,10.525 ; v1(99.4,10.325) 96.6,13.125 3.1@90.76,13.125 3.1@85.56,13.125 84.825,13.125 ; 6.1@115.56,4.885 6.1@120.76,4.885 ; 6.1@116.012,4.708 cw(c116.439,4.281) 116.439,4.885 cw(c116.439,5.489) 6.1@116.012,5.062 ; 6.1@120.308,4.708 ccw(c119.881,4.281) 119.881,4.885 ccw(c119.881,5.489) 6.1@120.308,5.062 ; 6.1@120.972,4.885 cw(c120.972,4.197) 121.459,4.684 ccw(c121.117,4.342) 121.117,4.825 ccw(c121.117,5.308) 121.459,4.966 cw(c121.262,5.163) 6.1@121.262,4.885 ; 6.1@121.212,4.708 cw(c121.494,4.426) v1@121.494,4.825 ; 6.1@121.22,4.717 cw(c121.6,4.372) v1@121.6,4.885 ; 6.1@121.22,5.053 ccw(c121.6,5.398) v1@121.6,4.885 ; 6.1@121.246,5.019 ccw(c121.6,5.245) v1(121.6,4.825) 120.82,4.825 6.1@120.76,4.885 ; v1@126.109,10.759 cw(c125.622,10.272) 126.31,10.272 ; v1@126.109,11.041 ccw(c125.622,11.528) 126.31,11.528 ; #.1@126.133,9.127 ccw(c125.706,9.554) 126.31,9.554 ccw(c126.914,9.554) #.1@126.487,9.127 ; #.1@126.133,13.423 cw(c125.706,12.996) 126.31,12.996 cw(c126.914,12.996) #.1@126.487,13.423 ; #.1@126.31,8.675 #.1@126.31,13.875 ; 126.31,10.562 cw(c126.588,10.562) v1@126.391,10.759 ; 126.31,11.238 ccw(c126.588,11.238) v1@126.391,11.041 ; 6.1@120.76,4.885 v1@121.6,4.885
  Bottom Layer w0.2: v1@99.541,10.466 ccw(c100.256,11.181) 100.256,10.171 ; 99.773,10.171 cw(c99.773,10.698) v1(99.4,10.325) 99.554,10.171 121.579,10.171 121.6,10.15 ; v1@121.459,4.966 ccw(c121.117,5.308) 121.6,5.308 ccw(c122.083,5.308) v1@121.741,4.966 ; v1(121.6,4.825) 121.6,10.15 ; v1@126.109,10.759 ccw(c125.767,10.417) 125.767,10.9 ccw(c125.767,11.383) v1@126.109,11.041 ; v1(126.25,10.9) 121.9,10.9 121.6,10.6 121.6,10.15
KEYY_2: 2.1 5.1 U1.30 | length 92.3
  Top Layer w0.2: v1(54.575,14.225) 54.8,14 ; v1@54.641,14.036 cw(c54.692,13.892) 54.8,14 ; v1@54.764,14.159 ccw(c54.908,14.108) 54.8,14 ; U1.30@54.8,12 54.8,14 ; v1@64.459,11.741 ccw(c64.117,12.083) 64.6,12.083 ccw(c65.083,12.083) v1@64.741,11.741 ; v1@64.459,14.559 cw(c64.117,14.217) 64.6,14.217 cw(c65.083,14.217) v1@64.741,14.559 ; v1(64.6,11.6) v1(64.6,14.7) ; v1(64.7,5.325) 75.12,5.325 2.1@75.56,4.885 2.1@80.76,4.885 80.775,4.9 89.875,4.9 91.225,6.25 104.825,6.25 v1(105.35,5.725) ; v1@64.841,5.184 cw(c65.183,4.842) 65.183,5.325 cw(c65.183,5.808) v1@64.841,5.466 ; 73.619,5.325 cw(c73.619,3.219) 2.1@75.108,4.708 ; 74.102,5.325 cw(c74.102,3.702) 2.1@75.25,4.85 ; 74.585,5.325 cw(c74.585,4.185) 2.1@75.391,4.991 ; 75.068,5.325 cw(c75.068,4.668) 2.1@75.532,5.132 ; 2.1@76.012,4.708 cw(c76.439,4.281) 76.439,4.885 cw(c76.439,5.489) 2.1@76.012,5.062 ; 2.1@80.308,4.708 ccw(c79.881,4.281) 79.881,4.885 ccw(c79.881,5.489) 2.1@80.308,5.062 ; 2.1@81.212,4.708 cw(c81.675,4.245) 81.675,4.9 ; 2.1@81.212,5.062 ccw(c81.602,5.452) 81.602,4.9 ; v1@105.15,5.725 ccw(c104.667,5.725) 105.009,6.066 ccw(c105.35,6.408) v1@105.35,5.925 ; v1@105.234,8.366 ccw(c104.892,8.708) 105.375,8.708 ccw(c105.858,8.708) v1@105.516,8.366 ; v1@105.275,8.398 ccw(c105.086,8.725) 105.451,8.627 ; v1(105.375,8.225) 105.375,9.125 5.1@105.5,9.25 5.1@110.7,9.25 ; v1@105.375,8.345 cw(c106.405,8.345) 5.1@105.677,9.073 ; 105.375,8.828 cw(c105.922,8.828) 5.1@105.535,9.215 ; 105.489,8.772 ccw(c106.058,8.619) v1@105.548,8.325 ; 5.1@105.952,9.073 cw(c106.379,8.646) 106.379,9.25 cw(c106.379,9.854) 5.1@105.952,9.427 ; 5.1@110.248,9.073 ccw(c109.821,8.646) 109.821,9.25 ccw(c109.821,9.854) 5.1@110.248,9.427
  Bottom Layer w0.2: v1@54.716,14.084 cw(c55.36,13.44) 55.36,14.35 ; 54.877,14.35 ccw(c54.877,13.923) v1(54.575,14.225) 54.7,14.35 64.25,14.35 v1(64.6,14.7) ; v1@64.4,14.7 cw(c63.917,14.7) 64.259,14.359 cw(c64.6,14.017) v1@64.6,14.5 ; v1@64.459,11.459 cw(c64.117,11.117) 64.6,11.117 cw(c65.083,11.117) v1@64.741,11.459 ; 64.6,6.049 ccw(c65.424,6.049) v1@64.841,5.466 ; v1(64.6,11.6) 64.6,5.425 v1(64.7,5.325) ; v1@105.209,5.866 ccw(c104.867,6.208) 105.35,6.208 ccw(c105.833,6.208) v1@105.491,5.866 ; v1@105.234,8.084 cw(c104.953,7.803) 105.35,7.803 ; v1(105.35,5.725) 105.35,8.2 v1(105.375,8.225) ; 105.35,7.682 cw(c105.918,7.682) v1@105.516,8.084
KEYY_3: 1.1 4.1 U1.31 | length 76.4
  Top Layer w0.2: v1@53.56,14.371 cw(c53.486,14.225) 53.65,14.225 ; v1@53.74,14.371 ccw(c53.814,14.225) 53.65,14.225 ; v1@53.85,14.55 ccw(c55.117,14.55) 54.221,13.654 ; 53.88,13.995 cw(c54.435,14.55) v1(53.65,14.55) 53.65,14.225 ; U1.31@54.4,12 54.4,13.475 53.65,14.225 ; 1.1@65.383,12.948 cw(c64.739,12.304) 65.65,12.304 ; 1.1@65.383,13.302 ccw(c64.739,13.946) 65.65,13.946 ; v1@65.484,14.659 cw(c65.082,14.257) 65.65,14.257 ; v1@65.509,11.741 ccw(c65.167,12.083) 65.65,12.083 ccw(c66.133,12.083) v1@65.791,11.741 ; v1(65.625,14.8) 65.625,15 65.65,14.975 65.65,13.215 1.1@65.56,13.125 ; v1@65.65,11.4 65.65,13.035 1.1@65.56,13.125 ; 65.65,12.739 cw(c65.946,12.739) 1.1@65.737,12.948 ; 65.65,13.511 ccw(c65.946,13.511) 1.1@65.737,13.302 ; 65.65,14.378 cw(c66.047,14.378) v1@65.766,14.659 ; 1.1@66.012,12.948 cw(c66.439,12.521) 66.439,13.125 cw(c66.439,13.729) 1.1@66.012,13.302 ; 1.1@70.308,12.948 ccw(c69.881,12.521) 69.881,13.125 ccw(c69.881,13.729) 1.1@70.308,13.302 ; 1.1@70.76,13.125 1.1@65.56,13.125 ; v1(85.5,4.3) 85.525,4.275 94.65,4.275 95.26,4.885 4.1@100.76,4.885 ; v1@85.641,4.159 cw(c85.922,3.878) 85.922,4.275 ; v1@85.641,4.441 ccw(c86.043,4.843) 86.043,4.275 ; 94.816,4.441 cw(c95.285,3.971) 4.1@95.285,4.635 ; 94.876,4.501 ccw(c94.492,4.885) 4.1@95.035,4.885 ; 4.1@96.012,4.708 cw(c96.439,4.281) 96.439,4.885 cw(c96.439,5.489) 4.1@96.012,5.062 ; 4.1@100.308,4.708 ccw(c99.881,4.281) 99.881,4.885 ccw(c99.881,5.489) 4.1@100.308,5.062
  Bottom Layer w0.2: v1(53.65,14.55) 53.95,14.85 63.15,14.85 63.825,15.525 65.375,15.525 65.625,15.275 v1(65.625,14.8) ; v1@65.485,14.943 ccw(c65.161,15.275) 65.625,15.275 ccw(c66.089,15.275) v1@65.765,14.943 ; v1(65.65,11.6) 66.9,11.6 73.025,5.475 84.325,5.475 v1(85.5,4.3) ; v1@65.791,11.459 cw(c66.133,11.117) 66.133,11.6 cw(c66.133,12.083) v1@65.791,11.741 ; v1@85.3,4.3 ccw(c84.817,4.3) 85.159,4.641 ccw(c85.5,4.983) v1@85.5,4.5
LED_GREEN: U1.17
LED_RED: U1.18
M3V3: C4.1 C5.1 C6.1 C39.1 C41.1 C42.1 J1.1 J3.1 Q2.S R5.2 R8.2 U1.26 U3.2 UB1.8 | length 119
  Top Layer w0.2: U1.26@56.4,12 56.4,14.25 56.85,14.7
  Top Layer w0.4: 38.875,11.802 ccw(c39.202,11.802) J3.1@38.971,11.571 ; J3.1@38.9,11.5 38.875,11.525 38.875,14.275 40.075,15.475 47.8,15.475 48.85,14.425 v1(49.9,14.425) ; J1.1@45.588,16.338 cw(c45.076,15.826) 45.8,15.826 cw(c46.524,15.826) J1.1@46.012,16.338 ; 45.8,15.525 J1.1@45.8,16.7 ; 56.975,14.825 57.775,14.825 ; C42.1@57.775,15.617 57.775,14.825 ; 58.8,13.627 ccw(c59.127,13.627) v1@58.896,13.396 ; v1(58.825,13.325) 58.8,13.35 58.8,14.825 ; C41.1@59.225,14.825 ccw(c59.225,15.226) C41.1@59.625,15.202 ; C41.1@59.225,15.226 cw(c58.8,15.251) 58.8,14.825 ; C41.1@59.475,15.214 59.086,14.825 58.8,14.825 ; v1(81.4,11.6) 81.9,11.6 85.375,15.075 v1(86.5,15.075) ; v1(90.875,4.975) 91.6,5.7 103.75,5.7 v1(104.175,5.275) ; 57.775,14.825 58.8,14.825
  Bottom Layer w0.4: v1(49.9,14.425) 50.925,13.4 58.75,13.4 v1(58.825,13.325) 59.35,13.85 67.525,13.85 69.75,11.625 86,11.625 86.875,10.75 86.875,6.368 87.75,5.493 C5.1@87.75,5.316 89.247,5.316 C4.1@89.6,4.963 ; 58.403,13.4 cw(c58.403,12.903) v1@58.754,13.254 ; 81.098,11.625 cw(c81.098,11.298) v1@81.329,11.529 ; v1@81.471,11.529 cw(c81.702,11.298) 81.702,11.625 ; v1(86.5,15.075) 88.892,15.075 R8.2@88.9,15.083 88.9,16.525 ; 87.489,5.754 cw(c87.052,5.316) C5.1@87.671,5.316 ; C5.1@87.802,5.316 cw(c87.802,3.368) C4.1@89.179,4.745 ; C39.1@88.545,16.461 cw(c87.687,15.604) 88.9,15.604 ; C39.1@88.583,16.525 88.9,16.525 ; 88.767,5.316 cw(c88.767,4.334) C4.1@89.462,5.028 ; C39.1@88.828,16.744 cw(c88.653,16.57) 88.9,16.57 ; C4.1@89.6,4.975 v1(90.875,4.975) U3.2@92.109,4.975 92.109,6.907 Q2.S@91.741,7.275 ; C4.1@90.021,4.745 cw(c90.575,4.191) v1@90.575,4.975 ; C4.1@90.021,5.181 ccw(c90.518,5.678) 90.518,4.975 ; 90.336,16.525 ccw(c90.336,16.869) UB1.8@90.579,16.626 ; 90.441,4.939 cw(c90.572,4.45) v1@90.825,4.888 ; UB1.8@91.1,16.555 91.07,16.525 88.9,16.525 ; Q2.S@91.559,7.093 cw(c90.232,5.766) 92.109,5.766 ; Q2.S@91.842,7.376 cw(c91.197,6.731) 92.109,6.731 ; U3.2@91.927,4.793 ccw(c91.488,4.354) 91.488,4.975 ccw(c91.488,5.596) 91.927,5.157 ccw(c91.488,5.596) 92.109,5.596 ccw(c92.73,5.596) U3.2@92.291,5.157 ; C6.1@103.125,6.275 103.125,5.8 103.65,5.275 v1(104.175,5.275) cw(c104.175,6.194) C6.1@103.383,5.727 ; C6.1@103.281,5.319 cw(c103.438,5.063) 103.65,5.275
MOTO+: P4.2 U5.8 | length 18.4
  Top Layer w0.5: v1(118.575,12.75) 118.575,13.525 119.325,14.275 v1(122.75,14.275)
  Bottom Layer w0.5: U5.8@113.225,12.745 118.57,12.745 v1(118.575,12.75) ; v1(122.75,14.275) 129.575,14.275 P4.2@129.6,14.3 ; 128.036,14.275 ccw(c128.036,14.964) P4.2@128.523,14.477 ; 128.157,14.275 cw(c128.157,13.757) P4.2@128.523,14.123